# EAGLE board ETH-IO_v2.1 (EAGLE 9.6.2)
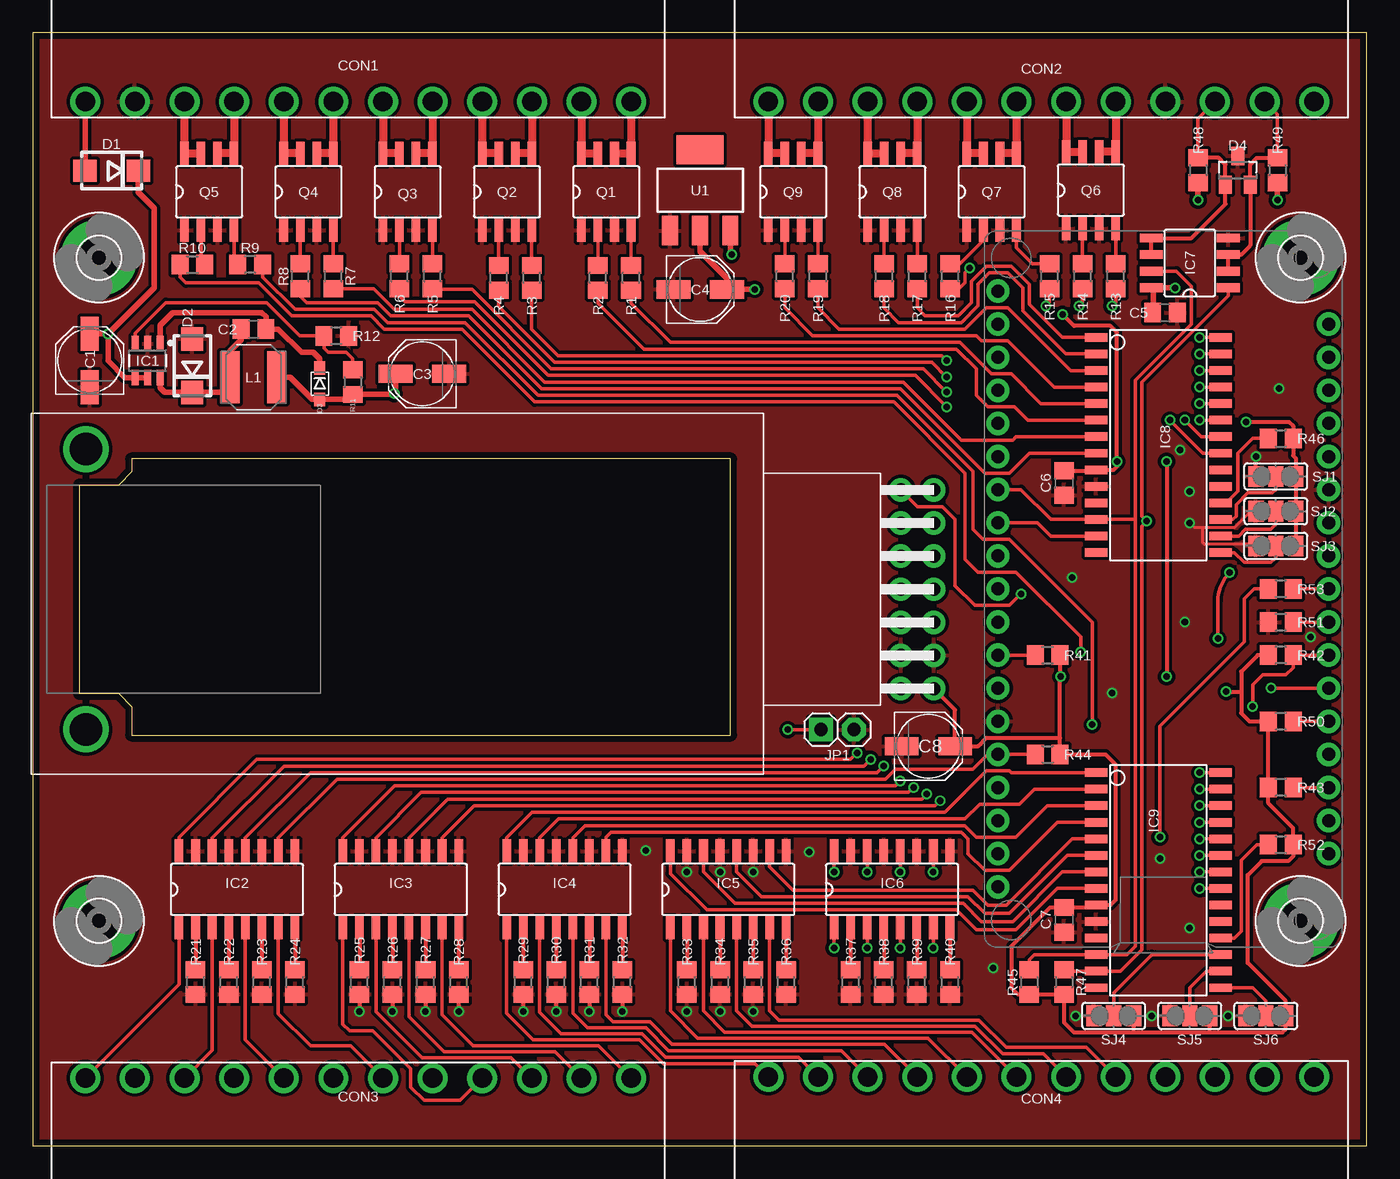
[diagram p0: board, top side]
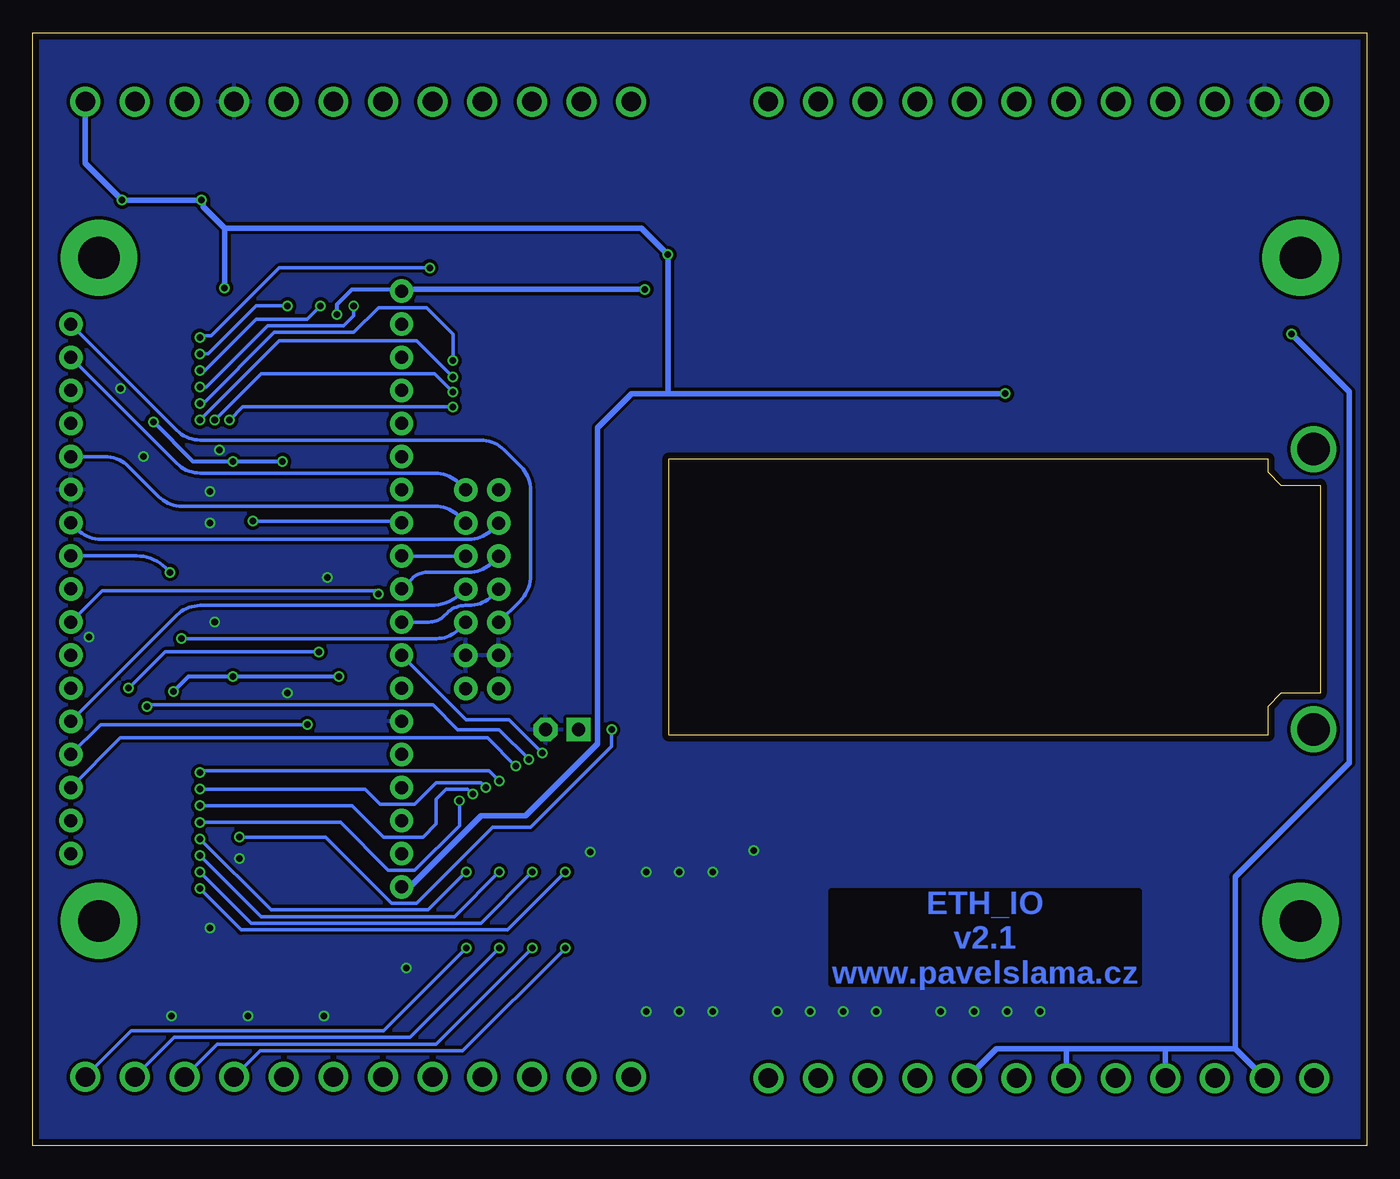
[diagram p1: board, bottom side, seen from below]

Size 102.45 x 85.45 mm. Coordinates in mm from the lower left corner, seen from the top.
Outline: 0,85.45 0,0 102.45,0 102.45,85.45 0,85.45
Copper layers (1*16): Top 0.035mm / dielectric 1.6mm / Bottom 0.035mm
Design rules "Elecrow_2-layer_optimal_PCB_eagle_rule *": minimum track width 6mil, minimum drill 12mil, track to track 6mil, track to pad 6mil, pad to pad 6mil, via to via 8mil, smd to smd 0mil, copper to edge 20mil, drill to drill 10mil, minimum pad ring 0.4mm, minimum via ring 6mil, stop-mask expansion 0mil, vias tented up to drill 100mil, thermal gap 10mil
Net classes: 0 default: width 0.254 mm, drill 0.5 mm; 1 ETH: width 0.254 mm, drill 0.35 mm; 2 RMII-TX: width 0.254 mm, drill 0.35 mm; 3 RMII-RX: width 0.254 mm, drill 0.35 mm; 4 I2C: width 0.254 mm, drill 0.35 mm; 5 PWR: width 0.305 mm, drill 0.5 mm; 6 I2C_DIFF: width 0.254 mm, drill 0.5 mm

## Footprints (pad centres in the part's own frame; a part is rotated, then mirrored left to right if it is on the bottom)
PANASONIC_C = smd 2.6 x 1.4: + 2.05,0; - -2.05,0
C0805 = smd 1.3 x 1.5: 1 -0.95,0; 2 0.95,0
MC1,5/12-G-3,81 = drill 1.5: 1 -20.955,8; 2 -17.145,8; 3 -13.335,8; 4 -9.525,8; 5 -5.715,8; 6 -1.905,8; 7 1.905,8; 8 5.715,8; 9 9.525,8; 10 13.335,8; 11 17.145,8; 12 20.955,8
DO214AC = smd 1.8 x 1.7: A 2.05,0; C -2.05,0
SOD323 = smd 1.03 x 0.839: A 1.206,0; C -1.206,0
SOT23 = smd 1 x 1.4: 1 -0.95,-1.1; 2 0.95,-1.1; 3 0,1.1
3,2-PAD = drill 3.2 pad 5.842: B3,2 0,0
SOT23-6 = smd 1.2 x 0.55: 1 -1.3,0.95; 2 -1.3,0; 3 -1.3,-0.95; 4 1.3,-0.95; 5 1.3,0; 6 1.3,0.95
SO16 = smd 0.66 x 1.778: 1 -4.445,-2.946; 2 -3.175,-2.946; 3 -1.905,-2.946; 4 -0.635,-2.946; 5 0.635,-2.946; 6 1.905,-2.946; 7 3.175,-2.946; 8 4.445,-2.946; 9 4.445,2.946; 10 3.175,2.946; 11 1.905,2.946; 12 0.635,2.946; 13 -0.635,2.946; 14 -1.905,2.946; 15 -3.175,2.946; 16 -4.445,2.946
SO08 = smd 0.66 x 1.778: 1 -1.905,-2.946; 2 -0.635,-2.946; 3 0.635,-2.946; 4 1.905,-2.946; 5 1.905,2.946; 6 0.635,2.946; 7 -0.635,2.946; 8 -1.905,2.946
SO28W = smd 0.65 x 1.7: 1 -7.62,-4.78; 2 -6.35,-4.78; 3 -5.08,-4.78; 4 -3.81,-4.78; 5 -2.54,-4.78; 6 -1.27,-4.78; 7 0,-4.78; 8 1.27,-4.78; 9 2.54,-4.78; 10 3.81,-4.78; 11 5.08,-4.78; 12 6.35,-4.78; 13 7.62,-4.78; 14 8.89,-4.78; 15 8.89,4.78; 16 7.62,4.78; 17 6.35,4.78; 18 5.08,4.78; 19 3.81,4.78; 20 2.54,4.78; 21 1.27,4.78; 22 0,4.78; 23 -1.27,4.78; 24 -2.54,4.78; 25 -3.81,4.78; 26 -5.08,4.78; 27 -6.35,4.78; 28 -7.62,4.78
1X02-S = drill 1.016 square: 1 -1.27,0 | drill 1.016 octagon: 2 1.27,0
L5040 = smd 1.5 x 4: 1 -1.8,0; 2 1.8,0
SO8 = smd 0.66 x 1.778: 1 -1.905,-2.946; 2 -0.635,-2.946; 3 0.635,-2.946; 4 1.905,-2.946; 5 1.905,2.946; 6 0.635,2.946; 7 -0.635,2.946; 8 -1.905,2.946
R0805 = smd 1.3 x 1.5: 1 -0.95,0; 2 0.95,0
SJ_2 = smd 1.168 x 1.6: 1 -1.524,0; 2 0,0; 3 1.524,0
SOT223 = smd 1.219 x 2.235: 1 -2.311,-3.099; 2 0,-3.099; 3 2.311,-3.099 | smd 3.6 x 2.2: 4 0,3.099
ESP32_DEVKITV1_38PIN = drill 1: +3V3 -12.7,22.86; CMD -12.7,-20.32; EN -12.7,20.32; G0 12.7,-10.16; G2 12.7,-12.7; G4 12.7,-7.62; G5 12.7,0; G12 -12.7,-7.62; G13 -12.7,-12.7; G14 -12.7,-5.08; G15 12.7,-15.24; G16 12.7,-5.08; G17 12.7,-2.54; G18 12.7,2.54; G19 12.7,5.08; G21 12.7,10.16; G22 12.7,17.78; G23 12.7,20.32; G25 -12.7,2.54; G26 -12.7,0; G27 -12.7,-2.54; G32 -12.7,7.62; G33 -12.7,5.08; G34 -12.7,12.7; G35 -12.7,10.16; GND@2 12.7,7.62; GND@3 -12.7,-10.16; RX0 12.7,12.7; SD0 12.7,-20.32; SD1 12.7,-17.78; SD2 -12.7,-15.24; SD3 -12.7,-17.78; SN -12.7,15.24; SP -12.7,17.78; TX0 12.7,15.24; VIN -12.7,-22.86
LAN8720_ETH_BOARD = drill 1: CRS 10.56,0; GND 13.1,-5.08; GND@1 10.56,-5.08; INT 13.1,0; MDC 10.56,-2.54; MDIO 13.1,-2.54; RX0 13.1,2.54; RX1 10.56,2.54; TX0 10.56,5.08; TX1 13.1,7.62; TX_EN 13.1,5.08; TXCO_EN 10.56,7.62; VCC 13.1,-7.62; VCC@1 10.56,-7.62 | drill 2.5: H1 -52,-10.75; H2 -52,10.75

## Placement (x,y rotation side)
C1  22uF/50V  [PANASONIC_C]  4.39,60.27 90 top
C2  100n  [C0805]  16.97,62.69 180 top
C3  22uF/50V  [PANASONIC_C]  29.92,59.26 180 top
C4  22uF/50V  [PANASONIC_C]  51.26,65.73 0 top
C5  100n  [C0805]  86.94,63.96 0 top
C6  100n  [C0805]  79.2,50.88 270 top
C7  100n  [C0805]  79.2,17.35 270 top
C8  100uF/6.3V  [PANASONIC_C]  68.78,30.68 0 top
CON1  MC1,5-12-G-3,81  [MC1,5/12-G-3,81]  25,88.15 180 top
CON2  MC1,5-12-G-3,81  [MC1,5/12-G-3,81]  77.45,88.15 180 top
CON3  MC1,5-12-G-3,81  [MC1,5/12-G-3,81]  25,-2.8 0 top
CON4  MC1,5-12-G-3,81  [MC1,5/12-G-3,81]  77.45,-2.7 0 top
D1  SS16  [DO214AC]  6.07,74.85 180 top
D2  SS16  [DO214AC]  12.27,59.89 90 top
D3  1N4148WS  [SOD323]  22.05,58.5 270 top
D4  BAT54A  [SOT23]  92.53,74.88 0 top
H1  MOUNT-PAD-ROUND3.2  [3,2-PAD]  5.1,17.28 0 top
H2  MOUNT-PAD-ROUND3.2  [3,2-PAD]  97.35,17.28 0 top
H3  MOUNT-PAD-ROUND3.2  [3,2-PAD]  97.35,68.17 0 top
H4  MOUNT-PAD-ROUND3.2  [3,2-PAD]  5.1,68.17 0 top
IC1  MCP16301T-I/CH  [SOT23-6]  8.84,60.27 270 top
IC2  TLP290-4  [SO16]  15.7,19.68 0 top
IC3  TLP290-4  [SO16]  28.27,19.68 0 top
IC4  TLP290-4  [SO16]  40.84,19.68 0 top
IC5  TLP290-4  [SO16]  53.42,19.68 0 top
IC6  TLP290-4  [SO16]  65.99,19.68 0 top
IC7  P82B96TD  [SO08]  88.85,67.77 90 top
IC8  MCP23017-E/SO  [SO28W]  86.44,54.43 270 top
IC9  MCP23017-E/SO  [SO28W]  86.44,21.03 270 top
JP1  [1X02-S]  61.8,31.95 0 top
L1  SRN5040-220M  [L5040]  16.97,59 180 top
Q1  BTS3410G  [SO8]  44.04,73.23 0 top
Q2  BTS3410G  [SO8]  36.42,73.23 0 top
Q3  BTS3410G  [SO8]  28.8,73.23 0 top
Q4  BTS3410G  [SO8]  21.18,73.23 0 top
Q5  BTS3410G  [SO8]  13.56,73.23 0 top
Q6  BTS3410G  [SO8]  81.25,73.35 0 top
Q7  BTS3410G  [SO8]  73.63,73.23 0 top
Q8  BTS3410G  [SO8]  66.01,73.23 0 top
Q9  BTS3410G  [SO8]  58.39,73.23 0 top
R1  1K  [R0805]  45.95,66.62 90 top
R2  1K  [R0805]  43.41,66.62 90 top
R3  1K  [R0805]  38.33,66.62 90 top
R4  1K  [R0805]  35.79,66.62 90 top
R5  1K  [R0805]  30.71,66.75 90 top
R6  1K  [R0805]  28.17,66.75 90 top
R7  1K  [R0805]  23.09,66.75 90 top
R8  1K  [R0805]  20.55,66.75 90 top
R9  1K  [R0805]  16.71,67.64 180 top
R10  1K  [R0805]  12.27,67.64 0 top
R11  52K3  [R0805]  24.59,58.62 270 top
R12  10K 1%  [R0805]  23.32,62.18 180 top
R13  1K  [R0805]  83.16,66.75 90 top
R14  1K  [R0805]  80.62,66.75 90 top
R15  1K  [R0805]  78.08,66.75 90 top
R16  1K  [R0805]  70.46,66.75 90 top
R17  1K  [R0805]  67.92,66.75 90 top
R18  1K  [R0805]  65.38,66.75 90 top
R19  1K  [R0805]  60.3,66.75 90 top
R20  1K  [R0805]  57.76,66.75 90 top
R21  3K9  [R0805]  12.52,12.57 90 top
R22  3K9  [R0805]  15.06,12.57 90 top
R23  3K9  [R0805]  17.6,12.57 90 top
R24  3K9  [R0805]  20.14,12.57 90 top
R25  3K9  [R0805]  25.1,12.57 90 top
R26  3K9  [R0805]  27.64,12.57 90 top
R27  3K9  [R0805]  30.18,12.57 90 top
R28  3K9  [R0805]  32.71,12.57 90 top
R29  3K9  [R0805]  37.67,12.57 90 top
R30  3K9  [R0805]  40.21,12.57 90 top
R31  3K9  [R0805]  42.75,12.57 90 top
R32  3K9  [R0805]  45.29,12.57 90 top
R33  3K9  [R0805]  50.24,12.57 90 top
R34  3K9  [R0805]  52.78,12.57 90 top
R35  3K9  [R0805]  55.32,12.57 90 top
R36  3K9  [R0805]  57.86,12.57 90 top
R37  3K9  [R0805]  62.81,12.57 90 top
R38  3K9  [R0805]  65.35,12.57 90 top
R39  3K9  [R0805]  67.89,12.57 90 top
R40  3K9  [R0805]  70.43,12.57 90 top
R41  10K  [R0805]  77.93,37.67 0 top
R42  10K  [R0805]  95.83,37.67 180 top
R43  10K  [R0805]  95.83,27.51 180 top
R44  10K  [R0805]  77.93,30.05 0 top
R45  2K2  [R0805]  76.53,12.57 270 top
R46  1K  [R0805]  95.83,54.3 0 top
R47  2K2  [R0805]  79.2,12.57 270 top
R48  680R  [R0805]  89.48,74.88 270 top
R49  680R  [R0805]  95.58,74.88 270 top
R50  4K7  [R0805]  95.83,32.59 180 top
R51  4K7  [R0805]  95.83,40.21 0 top
R52  1K  [R0805]  95.83,23.12 0 top
R53  680R  [R0805]  95.83,42.75 180 top
SJ1  [SJ_2]  95.45,51.38 0 top
SJ2  [SJ_2]  95.45,48.72 0 top
SJ3  [SJ_2]  95.45,46.05 0 top
SJ4  [SJ_2]  83.01,9.98 0 top
SJ5  [SJ_2]  88.85,9.98 0 top
SJ6  [SJ_2]  94.69,9.98 0 top
U1  LM1117-3.3  [SOT223]  51.26,73.35 0 top
U2  ESP32_DEVKITV1-38PIN  [ESP32_DEVKITV1_38PIN]  86.82,42.75 0 top
U3  WURTH 613014243121  [LAN8720_ETH_BOARD]  56.1,42.73 0 top

## Library data of the parts
C1-C8 = rcl; SPICEPREFIX: C
CON1-CON4 = my-con-terminal
D1 = my-diode; A: 1; V: 60
D2 = my-diode; A: 1; V: 40
D3 = my-diode
D4 = diode
H1-H4 = holes
IC1 = my-power
IC2-IC6 = my-opto
IC7 = my-ic; MSL: 1
IC8 IC9 = microchip; MF: MICROCHIP; MPN: MCP23017-E/SO; OC_FARNELL: 1332087; OC_NEWARK: 31K2958
JP1 = pinhead-2
L1 = my-inductor; ALT: DJNR5040-220-S; UH: 22
Q1-Q9 = my-load-switch
R1-R53 = rcl; SPICEPREFIX: R
SJ1-SJ6 = jumper
U1 = my-power; ALT: AMS1117-3.3
U2 = tmp
U3 = my-modules

## Nets
+3V3 [PWR]: C4.+ C6.1 C7.1 C8.+ IC8.9 IC9.9 R41.2 R42.2 R43.2 R44.2 R45.2 R46.2 R47.2 R50.2 R52.2 SJ1.3 SJ2.3 SJ3.3 SJ4.3 SJ5.3 SJ6.3 U1.2 U1.4 U2.+3V3 U3.VCC U3.VCC@1
+5V [PWR]: C3.+ C5.1 CON2.1 D3.A IC7.8 L1.1 R11.2 R48.2 R49.2 U1.3 U2.VIN
+24V [PWR]: C1.+ CON3.2 CON3.4 CON3.6 CON3.8 D1.C IC1.4 IC1.5
C_IN1: CON3.9 IC3.1
C_IN2: CON3.10 IC3.3
C_IN3: CON3.11 IC3.5
C_IN4: CON3.12 IC3.7
C_IN5: CON4.1 IC4.1
C_IN6: CON4.2 IC4.3
C_IN7: CON4.3 IC4.5
C_IN8: CON4.4 IC4.7
C_IN9: CON4.5 IC5.1
C_IN10: CON4.6 IC5.3
C_IN11: CON4.7 IC5.5
C_IN12: CON4.8 IC5.7
C_IN13: CON4.9 IC6.1
C_IN14: CON4.10 IC6.3
C_IN15: CON4.11 IC6.5
C_IN16: CON4.12 IC6.7
C_OUT1: CON2.5 Q6.5 Q6.6
C_OUT2: CON2.6 Q6.7 Q6.8
C_OUT3: CON2.7 Q7.5 Q7.6
C_OUT4: CON2.8 Q7.7 Q7.8
C_OUT5: CON2.9 Q8.5 Q8.6
C_OUT6: CON2.10 Q8.7 Q8.8
C_OUT7: CON2.11 Q9.5 Q9.6
C_OUT8: CON2.12 Q9.7 Q9.8
C_OUT9: CON1.1 Q1.5 Q1.6
C_OUT10: CON1.2 Q1.7 Q1.8
C_OUT11: CON1.3 Q2.5 Q2.6
C_OUT12: CON1.4 Q2.7 Q2.8
C_OUT13: CON1.5 Q3.5 Q3.6
C_OUT14: CON1.6 Q3.7 Q3.8
C_OUT15: CON1.7 Q4.5 Q4.6
C_OUT16: CON1.8 Q4.7 Q4.8
C_PWM1: CON1.9 Q5.5 Q5.6
C_PWM2: CON1.10 Q5.7 Q5.8
C_S0-IN1: CON3.1 IC2.1
C_S0-IN2: CON3.3 IC2.3
C_S0-IN3: CON3.5 IC2.5
C_S0-IN4: CON3.7 IC2.7
GND [PWR]: C1.- C3.- C4.- C5.2 C6.2 C7.2 C8.- CON1.11 CON2.4 D2.A D4.3 IC1.2 IC2.9 IC2.11 IC2.13 IC2.15 IC3.9 IC3.11 IC3.13 IC3.15 IC4.9 IC4.11 IC4.13 IC4.15 IC5.9 IC5.11 IC5.13 IC5.15 IC6.9 IC6.11 IC6.13 IC6.15 IC7.4 IC8.10 IC9.10 JP1.2 Q1.1 Q1.3 Q2.1 Q2.3 Q3.1 Q3.3 Q4.1 Q4.3 Q5.1 Q5.3 Q6.1 Q6.3 Q7.1 Q7.3 Q8.1 Q8.3 Q9.1 Q9.3 R12.1 R21.1 R22.1 R23.1 R24.1 R25.1 R26.1 R27.1 R28.1 R29.1 R30.1 R31.1 R32.1 R33.1 R34.1 R35.1 R36.1 R37.1 R38.1 R39.1 R40.1 R51.1 SJ1.1 SJ2.1 SJ3.1 SJ4.1 SJ5.1 SJ6.1 U1.1 U2.GND@2 U2.GND@3 U3.GND U3.GND@1
GPIO0: R50.1 U2.G0 U3.INT
GPIO17 [ETH]: R51.2 U2.G17 U3.TXCO_EN
GPIO18 [ETH]: U2.G18 U3.MDIO
GPIO21 [ETH]: U2.G21 U3.TX_EN
GPIO23 [ETH]: U2.G23 U3.MDC
GPIO27 [ETH]: U2.G27 U3.CRS
IN1: IC3.16 IC9.28
IN2: IC3.14 IC9.27
IN3: IC3.12 IC9.26
IN4: IC3.10 IC9.25
IN5: IC4.16 IC9.1
IN6: IC4.14 IC9.2
IN7: IC4.12 IC9.3
IN8: IC4.10 IC9.4
IN9: IC5.16 IC9.8
IN10: IC5.14 IC9.7
IN11: IC5.12 IC9.6
IN12: IC5.10 IC9.5
IN13: IC6.16 IC9.21
IN14: IC6.14 IC9.22
IN15: IC6.12 IC9.23
IN16: IC6.10 IC9.24
LED1: R53.1 U2.G5
LED_RED: JP1.1 R53.2
N$1: IC9.15 SJ6.2
N$2: IC8.16 SJ2.2
N$3: Q1.2 R2.2
N$4: Q1.4 R1.2
N$5: IC8.18 R46.1
N$6: IC9.18 R52.1
N$7: IC8.15 SJ3.2
N$8: Q5.4 R9.2
N$9: Q5.2 R10.2
N$10: IC9.16 SJ5.2
N$11: IC3.2 R25.2
N$12: IC3.4 R26.2
N$13: IC3.6 R27.2
N$14: IC3.8 R28.2
N$15: IC4.2 R29.2
N$16: IC4.4 R30.2
N$17: IC4.6 R31.2
N$18: IC4.8 R32.2
N$19: IC5.2 R33.2
N$20: IC5.4 R34.2
N$21: IC5.6 R35.2
N$22: IC5.8 R36.2
N$23: IC6.2 R37.2
N$24: IC6.4 R38.2
N$25: IC6.6 R39.2
N$26: IC6.8 R40.2
N$27: IC9.17 SJ4.2
N$28: Q2.4 R3.2
N$29: Q2.2 R4.2
N$30: IC8.17 SJ1.2
N$32: Q3.4 R5.2
N$33: Q3.2 R6.2
N$36: Q4.4 R7.2
N$37: Q4.2 R8.2
N$38: IC2.2 R21.2
N$40: Q6.4 R13.2
N$41: Q6.2 R14.2
N$44: Q7.4 R15.2
N$45: Q7.2 R16.2
N$48: Q8.4 R17.2
N$49: Q8.2 R18.2
N$52: Q9.4 R19.2
N$53: Q9.2 R20.2
N$55: IC2.4 R22.2
N$56: IC2.6 R23.2
N$57: IC2.8 R24.2
N$67: C2.2 D2.C IC1.6 L1.2
N$68: C2.1 D3.C IC1.1
N$69: IC1.3 R11.1 R12.2
OUT1: IC8.27 R13.1
OUT2: IC8.26 R14.1
OUT3: IC8.25 R15.1
OUT4: IC8.28 R16.1
OUT5: IC8.1 R17.1
OUT6: IC8.2 R18.1
OUT7: IC8.3 R19.1
OUT8: IC8.4 R20.1
OUT9: IC8.5 R1.1
OUT10: IC8.6 R2.1
OUT11: IC8.24 R3.1
OUT12: IC8.23 R4.1
OUT13: IC8.22 R5.1
OUT14: IC8.21 R6.1
OUT15: IC8.7 R7.1
OUT16: IC8.8 R8.1
PAIR1_N [RMII-RX]: U2.G26 U3.RX1
PAIR1_P [RMII-RX]: U2.G25 U3.RX0
PAIR2_N [RMII-TX]: U2.G22 U3.TX1
PAIR2_P [RMII-TX]: U2.G19 U3.TX0
PWM1: R9.1 U2.G2
PWM2: R10.1 U2.G4
S0-1: IC2.16 R41.1 U2.G14
S0-2: IC2.14 R42.1 U2.G16
S0-3: IC2.12 R43.1 U2.G15
S0-4: IC2.10 R44.1 U2.G13
SCL [I2C]: IC7.7 IC8.12 IC9.12 R45.1 U2.G32
SCL_X [I2C_DIFF]: CON2.3 D4.1 IC7.5 IC7.6 R48.1
SDA [I2C]: IC7.1 IC8.13 IC9.13 R47.1 U2.G33
SDA_X [I2C_DIFF]: CON2.2 D4.2 IC7.2 IC7.3 R49.1
VCC: CON1.12 D1.A

## Tracks (layer width: path | path; a pad name or v marks a point on that pad's centre or on a via)
+3V3  (via drill 0.5)
  Top 0.305: 78.88,31.32 R44.2 82.37,30.05 83.13,29.29 83.13,18.87 82.75,18.49 IC9.9 arc-45 81.19,18.3 C7.1 78.11,18.3 75.13,15.32 75.13,12.14 75.65,11.62 R45.2 R47.2 79.2,9.47 79.96,8.71 84.53,8.71 | 78.88,31.32 73.25,31.32 72.61,30.68 C8.+ 70.83,33.47 U3.VCC | C6.1 81.59,51.83 IC8.9 83.01,51.89 83.26,52.15 v83.26,52.53 83.26,62.43 82.75,62.94 79.96,62.94 v79.07,63.83 | v93.17,55.58 96.47,55.58 96.78,55.26 R46.2 96.78,52.97 96.98,52.78 SJ1.3 SJ2.3 SJ3.3 | SJ4.3 84.53,8.71 | 84.53,8.71 90.37,8.71 | 90.37,8.71 SJ5.3 | 90.37,8.71 95.96,8.71 96.21,8.97 SJ6.3 96.21,11.12 93.29,14.05 93.29,20.78 94.37,21.85 96.4,21.85 96.78,22.23 R52.2 96.78,24.4 94.88,26.3 R43.2 R50.2 93.42,32.59 92.79,33.22 92.79,34.87 | R42.2 94.06,37.67 92.79,36.4 92.79,34.87 | 78.88,31.32 78.88,35.95 v78.94,36.02 78.88,36.08 R41.2 | v91.64,34.87 92.79,34.87 | v87.07,52.53 v87.07,36.02
  Top 0.406: U1.2 51.26,68.66 53.31,66.61 C4.+ v55.45,65.73
  Bottom 0.305: v79.07,63.83 79.07,64.59 77.93,65.73 74.12,65.73 | v83.26,52.53 v87.07,52.53 90.12,52.53 v93.17,55.58 | v78.94,36.02 v87.07,36.02 90.5,36.02 v91.64,34.87
  Bottom 0.406: U2.+3V3 74.12,65.73 v55.45,65.73
+5V  (via drill 0.5)
  Top 0.406: L1.1 19.76,59 21.48,57.29 D3.A 24.2,57.29 R11.2 27.7,57.67 v27.76,57.73 27.87,57.84 C3.+ | v53.67,68.4 53.57,68.5 U1.3 | C5.1 86.05,63.9 86.05,65.71 IC7.8 v87.71,65.86 | R48.2 v89.48,72.59 | R49.2 v95.58,72.59
  Bottom 0.406: 53.67,57.73 v53.67,68.4 55.7,70.43 87.71,70.43 | v27.76,57.73 53.67,57.73 | U2.VIN 73.48,19.89 68.02,25.35 64.59,25.35 59.07,30.87 59.07,55.13 56.46,57.73 53.67,57.73 | 87.71,70.43 v87.71,65.86 | 87.71,70.43 89.36,72.08 89.36,72.47 v89.48,72.59 v95.58,72.59 98.41,75.42 CON2.1
+24V  (via drill 0.5)
  Top 0.406: D1.C 8.12,73.18 9.35,71.96 9.35,65.88 v5.79,62.32 | C1.+ v5.79,62.32 | IC1.5 IC1.4 7.09,58.97 5.79,60.27 v5.79,62.32
  Bottom 0.406: v5.79,62.32 1.35,57.88 1.35,29.41 10.11,20.65 10.11,7.45 | 15.47,7.45 CON3.4 | 15.47,7.45 23.1,7.45 | 23.1,7.45 CON3.6 | 23.1,7.45 28.46,7.45 CON3.8 | 10.11,7.45 15.47,7.45 | 10.11,7.45 CON3.2
C_IN1
  Top 0.254: IC3.1 23.83,9.35 24.33,8.84 26.11,8.84 29.03,5.92 29.03,4.52 30.05,3.5 32.83,3.5 CON3.9
C_IN2
  Top 0.254: IC3.3 26.37,10.31 29.9,6.78 36.75,6.78 CON3.10
C_IN3
  Top 0.254: IC3.5 28.91,9.93 31.6,7.24 40.11,7.24 CON3.11
C_IN4
  Top 0.254: IC3.7 31.45,10.06 33.81,7.7 43.46,7.7 CON3.12
C_IN5
  Top 0.254: IC4.1 36.4,10.19 38.43,8.15 46.61,8.15 48.45,6.32 55.48,6.32 CON4.1
C_IN6
  Top 0.254: IC4.3 38.94,10.26 40.59,8.61 46.79,8.61 48.59,6.81 58.8,6.81 CON4.2
C_IN7
  Top 0.254: IC4.5 41.48,10.19 42.6,9.07 47.09,9.07 48.84,7.31 62.1,7.31 CON4.3
C_IN8
  Top 0.254: IC4.7 44.02,10.06 44.55,9.53 47.4,9.53 49.1,7.82 65.4,7.82 CON4.4
C_IN9
  Top 0.254: IC5.1 48.97,10.36 51.05,8.28 68.75,8.28 CON4.5
C_IN10
  Top 0.254: IC5.3 51.51,10.36 53.14,8.74 72.11,8.74 CON4.6
C_IN11
  Top 0.254: IC5.5 54.05,10.36 55.22,9.2 72.36,9.2 74.5,7.06 77.59,7.06 CON4.7
C_IN12
  Top 0.254: IC5.7 56.59,10.36 57.3,9.65 72.67,9.65 74.75,7.57 80.9,7.57 CON4.8
C_IN13  (via drill 0.5)
  Top 0.254: IC6.1 v61.54,15.19
  Bottom 0.254: v61.54,15.19 69.42,7.31 84.96,7.31 CON4.9
C_IN14  (via drill 0.5)
  Top 0.254: IC6.3 v64.08,15.19
  Bottom 0.254: v64.08,15.19 71.45,7.82 88.26,7.82 CON4.10
C_IN15  (via drill 0.5)
  Top 0.254: IC6.5 v66.62,15.19
  Bottom 0.254: v66.62,15.19 73.48,8.33 91.56,8.33 CON4.11
C_IN16  (via drill 0.5)
  Top 0.254: IC6.7 v69.16,15.19
  Bottom 0.254: v69.16,15.19 75.51,8.84 94.87,8.84 CON4.12
C_OUT1
  Top 0.61: Q6.6 83.13,76.3 Q6.5 CON2.5
C_OUT2
  Top 0.61: Q6.7 Q6.8 CON2.6
C_OUT3
  Top 0.61: Q7.6 Q7.5 CON2.7
C_OUT4
  Top 0.61: Q7.7 Q7.8 CON2.8
C_OUT5
  Top 0.61: Q8.6 Q8.5 CON2.9
C_OUT6
  Top 0.61: Q8.7 Q8.8 CON2.10
C_OUT7
  Top 0.61: Q9.6 Q9.5 CON2.11
C_OUT8
  Top 0.61: Q9.7 Q9.8 CON2.12
C_OUT9
  Top 0.61: Q1.6 Q1.5 CON1.1
C_OUT10
  Top 0.61: Q1.7 Q1.8 CON1.2
C_OUT11
  Top 0.61: Q2.6 Q2.5 CON1.3
C_OUT12
  Top 0.61: Q2.7 Q2.8 CON1.4
C_OUT13
  Top 0.61: Q3.6 30.63,76.17 Q3.5 CON1.5
C_OUT14
  Top 0.61: Q3.7 Q3.8 CON1.6
C_OUT15
  Top 0.61: Q4.6 Q4.5 CON1.7
C_OUT16
  Top 0.61: Q4.7 Q4.8 CON1.8
C_PWM1
  Top 0.61: Q5.6 Q5.5 CON1.9
C_PWM2
  Top 0.61: Q5.7 Q5.8 CON1.10
C_S0-IN1
  Top 0.254: CON3.1 11.25,12.41 IC2.1
C_S0-IN2
  Top 0.254: CON3.3 13.79,7.33 IC2.3
C_S0-IN3
  Top 0.254: CON3.5 16.33,8.15 IC2.5
C_S0-IN4
  Top 0.254: IC2.7 18.87,10.16 21.34,7.7 24.41,7.7 CON3.7
GND  (via drill 0.5)
  Top 0.22: SJ2.1 93.55,48.72 92.28,47.45 89.86,47.45 | SJ3.1 93.8,46.18 89.99,46.18 89.86,46.3 89.86,47.45 | 89.86,47.45 89.23,47.45 v88.85,47.83
  Top 0.305: R32.1 v45.29,10.31 | R31.1 v42.75,10.31 | R30.1 v40.21,10.31 | R29.1 v37.67,10.31 | R28.1 v32.71,10.31 | R27.1 v30.18,10.31 | R26.1 v27.64,10.31 | R25.1 v25.1,10.31 | SJ1.1 v93.93,52.91
  other vias: 59.64,22.55 50.24,10.31 52.78,10.31 55.32,10.31 47.07,22.68 55.32,21.03 52.78,21.03 50.24,21.03 80.09,9.98 85.93,9.98 91.77,9.98 73.74,13.66 82.88,34.75 88.85,16.71 88.47,40.21 88.85,50.24 79.83,43.64 98.12,39.07 88.09,53.42 95.71,58.12 86.56,22.05
  cutout Bottom: 73.86,33.35 73.86,31.95 72.97,31.95 72.97,33.35
  pour Bottom (isolate 0.254): 0,85.45 0,0 102.45,0 102.45,85.45
  pour Top (isolate 0.254): 0,85.45 0,0 102.45,0 102.45,85.45
GPIO0
  Top 0.254: R50.1 U2.G0
  Bottom 0.254: U2.G0 91.37,40.73 arc45 89.57,41.48 71.88,41.48 arc-45 69.43,42.49 U3.INT
GPIO17  (via drill 0.5)
  Top 0.254: v75.89,42.37 75.01,41.48 72.34,41.48 70.81,43 70.81,48.1 69.84,49.08 67.93,49.08 U3.TXCO_EN | R51.2 U2.G17
  Bottom 0.254: v75.89,42.37 76.15,42.62 97.1,42.62 U2.G17
GPIO18  (via drill 0.5)
  Top 0.254: v91.01,38.94 91.01,41.82 arc-45 91.9,43.97 v91.9,44.02
  Bottom 0.254: v91.9,44.02 92.24,44.36 arc-45 94.47,45.29 U2.G18 | v91.01,38.94 71.42,38.94 arc-45 69.76,39.63 U3.MDIO
GPIO21
  Bottom 0.254: U2.G21 96.89,52.91 arc45 95.09,52.16 92.77,49.84 arc-45 90.97,49.1 71.54,49.1 arc45 69.75,48.35 U3.TX_EN
GPIO23
  Bottom 0.254: U2.G23 91.37,54.92 arc-45 89.57,54.18 68.06,54.18 arc45 66.26,53.43 64.95,52.13 arc45 64.21,50.33 64.21,43.8 arc45 65.03,41.81 U3.MDC
GPIO27
  Bottom 0.254: U2.G27 72.01,40.21 arc-45 70.84,40.7 70.63,40.9 arc45 69.24,41.48 68.96,41.48 arc-45 67.16,42.22 U3.CRS
IN1  (via drill 0.5)
  Top 0.254: IC3.16 23.83,23.65 27.81,27.64 66.24,27.64 v66.62,28.02 | IC9.28 v89.61,28.65
  Bottom 0.254: v66.62,28.02 67.39,28.78 89.48,28.78 v89.61,28.65
IN2  (via drill 0.5)
  Top 0.254: IC3.14 26.37,23.65 29.85,27.13 67.26,27.13 v67.64,27.51 | IC9.27 v89.61,27.38
  Bottom 0.254: v67.64,27.51 68.02,27.89 71.45,27.89 73.1,26.24 75.77,26.24 76.91,27.38 v89.61,27.38
IN3  (via drill 0.5)
  Top 0.254: IC3.12 28.91,23.65 31.88,26.62 68.27,26.62 v68.66,27 | IC9.26 v89.61,26.11
  Bottom 0.254: v68.66,27 69.04,27.38 70.69,27.38 71.45,26.62 71.45,24.71 72.47,23.7 75.51,23.7 77.93,26.11 v89.61,26.11
IN4  (via drill 0.5)
  Top 0.254: IC3.10 31.45,23.65 33.91,26.11 69.29,26.11 v69.67,26.49 | IC9.25 v89.61,24.84
  Bottom 0.254: v69.67,26.49 69.67,24.59 73.1,21.16 75.13,21.16 78.82,24.84 v89.61,24.84
IN5
  Top 0.254: IC4.16 36.4,23.65 38.35,25.6 70.05,25.6 73.23,28.78 75.01,28.78 75.13,28.65 IC9.1
IN6
  Top 0.254: IC4.14 38.94,23.65 40.39,25.1 71.58,25.1 72.72,26.24 75.77,26.24 76.91,27.38 IC9.2
IN7
  Top 0.254: IC4.12 41.48,23.65 42.42,24.59 71.58,24.59 72.47,23.7 75.51,23.7 77.93,26.11 IC9.3
IN8
  Top 0.254: IC4.10 44.02,23.7 44.4,24.08 71.32,24.08 71.83,23.57 71.83,22.43 73.1,21.16 75.01,21.16 78.69,24.84 IC9.4
IN9
  Top 0.254: IC5.16 48.97,20.9 51.77,18.11 70.94,18.11 72.47,16.59 75.51,16.59 78.69,19.76 IC9.8
IN10
  Top 0.254: IC5.14 51.51,21.03 53.92,18.62 71.45,18.62 72.85,17.22 75.26,17.22 79.07,21.03 IC9.7
IN11
  Top 0.254: IC5.12 54.05,21.03 55.96,19.13 71.83,19.13 73.1,17.86 75.01,17.86 79.45,22.3 IC9.6
IN12
  Top 0.254: IC5.10 56.59,21.41 58.37,19.63 72.21,19.63 73.35,18.49 74.75,18.49 79.83,23.57 IC9.5
IN13  (via drill 0.5)
  Top 0.254: IC6.16 v61.54,21.03 | v89.61,19.76 IC9.21
  Bottom 0.254: v61.54,21.03 65.99,16.59 86.44,16.59 v89.61,19.76
IN14  (via drill 0.5)
  Top 0.254: IC6.14 v64.08,21.03 | v89.61,21.03 IC9.22
  Bottom 0.254: v64.08,21.03 68.02,17.09 85.67,17.09 v89.61,21.03
IN15  (via drill 0.5)
  Top 0.254: IC6.12 v66.62,21.03 | v89.61,22.3 IC9.23
  Bottom 0.254: v66.62,21.03 70.05,17.6 84.91,17.6 v89.61,22.3
IN16  (via drill 0.5)
  Top 0.254: IC6.10 v69.16,21.03 | v89.61,23.57 IC9.24
  Bottom 0.254: v69.16,21.03 72.08,18.11 84.15,18.11 v89.61,23.57
LED1
  Top 0.254: U2.G5 R53.1
LED_RED  (via drill 0.5)
  Top 0.254: JP1.1 v57.99,31.95 | v86.56,23.7 86.56,32.21 93.04,38.68 93.04,41.99 93.8,42.75 R53.2
  Bottom 0.254: v57.99,31.95 57.99,30.68 64.21,24.46 67.13,24.46 72.97,18.62 74.88,18.62 79.96,23.7 v86.56,23.7
N$1
  Top 0.254: IC9.15 93.67,12.14 94.69,11.12 SJ6.2
N$2
  Top 0.254: IC8.16 92.61,46.81 93.12,47.32 95.07,47.32 95.45,47.7 SJ2.2
N$3
  Top 0.254: Q1.2 R2.2
N$4
  Top 0.254: Q1.4 R1.2
N$5
  Top 0.254: IC8.18 91.64,49.35 92.53,50.24 92.53,53.16 93.67,54.3 R46.1
N$6
  Top 0.254: IC9.18 92.28,15.95 92.79,16.46 92.79,21.92 93.99,23.12 R52.1
N$7
  Top 0.254: IC8.15 92.28,45.54 93.04,44.78 95.07,44.78 95.45,45.16 SJ3.2
N$8
  Top 0.254: Q5.4 15.47,67.93 R9.2
N$9
  Top 0.254: Q5.2 12.93,67.93 R10.2
N$10
  Top 0.254: SJ5.2 88.85,12.14 90.12,13.41 IC9.16
N$11
  Top 0.305: IC3.2 R25.2
N$12
  Top 0.305: IC3.4 R26.2
N$13
  Top 0.305: IC3.6 R27.2
N$14
  Top 0.305: IC3.8 R28.2
N$15
  Top 0.305: IC4.2 R29.2
N$16
  Top 0.305: IC4.4 R30.2
N$17
  Top 0.305: IC4.6 R31.2
N$18
  Top 0.305: IC4.8 R32.2
N$19
  Top 0.305: IC5.2 R33.2
N$20
  Top 0.305: IC5.4 R34.2
N$21
  Top 0.305: IC5.6 R35.2
N$22
  Top 0.305: IC5.8 R36.2
N$23
  Top 0.305: IC6.2 R37.2
N$24
  Top 0.305: IC6.4 R38.2
N$25
  Top 0.305: IC6.6 R39.2
N$26
  Top 0.305: IC6.8 R40.2
N$27
  Top 0.254: SJ4.2 83.01,11.76 85.93,14.68 IC9.17
N$28
  Top 0.254: Q2.4 R3.2
N$29
  Top 0.254: Q2.2 R4.2
N$30
  Top 0.254: IC8.17 92.15,48.08 92.41,48.34 92.41,49.23 93.29,50.11 95.2,50.11 95.45,50.37 SJ1.2
N$32
  Top 0.254: Q3.4 R5.2
N$33
  Top 0.254: Q3.2 R6.2
N$36
  Top 0.254: Q4.4 R7.2
N$37
  Top 0.254: Q4.2 R8.2
N$38
  Top 0.305: IC2.2 R21.2
N$40
  Top 0.254: Q6.4 R13.2
N$41
  Top 0.254: Q6.2 R14.2
N$44
  Top 0.254: Q7.4 75.54,68.93 76.77,67.7 R15.2
N$45
  Top 0.254: R16.2 71.18,67.7 73,69.52 Q7.2
N$48
  Top 0.254: Q8.4 R17.2
N$49
  Top 0.254: Q8.2 R18.2
N$52
  Top 0.254: Q9.4 R19.2
N$53
  Top 0.254: Q9.2 R20.2
N$55
  Top 0.305: IC2.4 R22.2
N$56
  Top 0.305: IC2.6 R23.2
N$57
  Top 0.305: IC2.8 R24.2
N$67
  Top 0.406: IC1.6 9.79,58.18 10.13,57.84 D2.C 15.17,57.84 L1.2 15.17,61.01 16.02,61.86 C2.2
N$68
  Top 0.406: IC1.1 9.79,63 10.74,63.96 17.6,63.96 17.92,63.64 C2.1 18.87,62.69 20.65,60.91 21.54,60.91 22.05,60.4 D3.C
N$69
  Top 0.254: IC1.3 7.89,62.37 10.24,64.72 17.98,64.72 20.52,62.18 R12.2 22.37,61.22 22.68,60.91 24.08,60.91 24.59,60.4 R11.1
OUT1  (via drill 0.5)
  Top 0.254: R13.1 83.16,64.74 v82.88,64.47 | IC8.27 v89.61,60.78
  Bottom 0.254: v82.88,64.47 85.29,64.47 88.98,60.78 v89.61,60.78
OUT2  (via drill 0.5)
  Top 0.254: R14.1 80.62,64.74 v80.34,64.47 | IC8.26 v89.61,59.51
  Bottom 0.254: v80.34,64.47 81.36,63.45 85.29,63.45 89.23,59.51 v89.61,59.51
OUT3  (via drill 0.5)
  Top 0.254: R15.1 78.08,64.74 v77.8,64.47 | IC8.25 v89.61,58.24
  Bottom 0.254: v77.8,64.47 77.8,63.7 78.56,62.94 84.4,62.94 89.1,58.24 v89.61,58.24
OUT4  (via drill 0.5)
  Top 0.254: R16.1 71.13,65.8 71.58,66.24 71.58,67 v71.96,67.39 | v89.61,62.05 IC8.28
  Bottom 0.254: v71.96,67.39 83.52,67.39 88.72,62.18 89.48,62.18 v89.61,62.05
OUT5
  Top 0.254: IC8.1 79.07,62.05 76.53,64.59 76.53,66.12 75.13,67.51 73.23,67.51 72.08,66.37 72.08,64.72 71.07,63.7 68.53,63.7 67.92,64.31 R17.1
OUT6
  Top 0.254: IC8.2 79.32,60.78 76.02,64.08 76.02,65.86 74.88,67 73.48,67 72.59,66.12 72.59,64.47 71.32,63.2 66.5,63.2 65.38,64.31 R18.1
OUT7
  Top 0.254: R19.1 60.3,64.31 61.93,62.69 71.58,62.69 73.23,64.34 74.88,64.34 79.7,59.51 IC8.3
OUT8
  Top 0.254: R20.1 57.76,64.31 59.89,62.18 72.47,62.18 72.85,61.8 74.88,61.8 78.43,58.24 IC8.4
OUT9
  Top 0.254: IC8.5 77.42,56.97 75.13,59.26 73.61,59.26 71.2,61.67 48.97,61.67 45.95,64.69 R1.1
OUT10
  Top 0.254: IC8.6 76.4,55.7 75.39,56.72 73.35,56.72 72.47,57.61 72.47,59.64 70.94,61.16 46.94,61.16 43.41,64.69 R2.1
OUT11  (via drill 0.5)
  Top 0.254: v70.18,60.27 69.8,60.66 40.34,60.66 38.33,62.66 R3.1 | IC8.24 v89.61,56.97
  Bottom 0.254: v89.61,56.97 89.36,56.97 83.9,62.43 77.8,62.43 75.89,64.34 72.21,64.34 70.18,62.31 v70.18,60.27
OUT12  (via drill 0.5)
  Top 0.254: v70.18,59 69.04,60.15 40.08,60.15 35.79,64.44 R4.1 | IC8.23 v89.61,55.7
  Bottom 0.254: v70.18,59 72.97,61.8 83.52,61.8 v89.61,55.7
OUT13  (via drill 0.5)
  Top 0.254: v70.18,57.86 68.4,59.64 39.83,59.64 33.73,65.73 30.3,65.73 30.37,65.8 R5.1 | v88.47,55.7 89.74,54.43 IC8.22
  Bottom 0.254: v70.18,57.86 71.58,59.26 84.91,59.26 v88.47,55.7
OUT14  (via drill 0.5)
  Top 0.254: v70.18,56.72 67.77,59.13 39.57,59.13 33.92,64.78 28.59,64.78 28.17,65.2 R6.1 | IC8.21 89.86,53.16 v87.32,55.7
  Bottom 0.254: v87.32,55.7 86.31,56.72 v70.18,56.72
OUT15
  Top 0.254: IC8.7 75.51,54.43 75.26,54.18 71.32,54.18 66.88,58.62 39.32,58.62 33.73,64.21 27.76,64.21 26.17,65.8 R7.1
OUT16
  Top 0.254: IC8.8 76.53,53.16 75.01,51.64 73.1,51.64 66.62,58.12 39.07,58.12 33.48,63.7 27.51,63.7 26.49,64.72 21.03,64.72 20.55,65.2 R8.1
PAIR1_N
  Bottom 0.254: U2.G26 73.32,43.54 arc45 72.18,44.02 68.96,44.02 arc-45 67.16,44.76 U3.RX1
PAIR1_P
  Bottom 0.254: U3.RX0 74.09,45.27 U2.G25
PAIR2_N
  Bottom 0.254: U2.G22 91.37,52.38 arc-45 89.57,51.64 71.54,51.64 arc45 69.75,50.89 U3.TX1
PAIR2_P
  Bottom 0.254: U2.G19 98.99,47.3 arc-45 97.19,46.56 68.96,46.56 arc-45 67.16,47.3 U3.TX0
PWM1  (via drill 0.5)
  Top 0.254: v81.36,32.33 81.36,40.21 75.01,46.56 72.97,46.56 72.21,47.32 72.21,51.77 66.37,57.61 38.81,57.61 33.22,63.2 27.25,63.2 26.24,64.21 20.14,64.21 17.66,66.69 R9.1
  Bottom 0.254: v81.36,32.33 97.23,32.33 U2.G2
PWM2  (via drill 0.5)
  Top 0.254: v80.47,37.92 80.47,39.07 75.51,44.02 72.59,44.02 71.58,45.03 71.58,51.64 66.12,57.1 38.56,57.1 32.97,62.69 27,62.69 25.98,63.7 19.89,63.7 17.35,66.24 11.76,66.24 11.32,66.68 R10.1 | v95.07,35.13 U2.G4
  Bottom 0.254: v95.07,35.13 92.28,37.92 v80.47,37.92
S0-1  (via drill 0.5)
  Top 0.254: IC2.16 11.25,23.7 17.22,29.67 62.81,29.67 v63.32,30.18 | R41.1 U2.G14
  Bottom 0.254: v63.32,30.18 65.86,32.71 69.16,32.71 U2.G14
S0-2  (via drill 0.5)
  Top 0.254: IC2.14 13.79,23.65 19.3,29.16 63.83,29.16 v64.34,29.67 | v93.67,33.73 93.67,35.38 94.44,36.14 96.21,36.14 96.78,36.71 R42.1 U2.G16
  Bottom 0.254: v64.34,29.67 66.62,31.95 69.8,31.95 71.7,33.86 93.55,33.86 v93.67,33.73
S0-3  (via drill 0.5)
  Top 0.254: IC2.12 16.33,23.65 21.34,28.65 64.85,28.65 v65.35,29.16 | R43.1 U2.G15
  Bottom 0.254: v65.35,29.16 67.51,31.32 95.71,31.32 U2.G15
S0-4
  Top 0.254: IC2.10 18.87,23.65 23.37,28.14 65.48,28.14 66.24,28.91 72.21,28.91 73.35,30.05 U2.G13 R44.1
SCL
  Top 0.254: U2.G32 75.89,50.37 78.18,48.08 IC8.12 84.66,48.08 | 84.66,48.08 84.66,58.75 88.98,63.07 88.98,65.99 87.83,67.13 IC7.7 | 84.66,48.08 84.66,15.32 84.02,14.68 IC9.12 76.91,14.68 76.53,14.3 R45.1
SCL_X
  Top 0.254: R48.1 89.48,78.85 CON2.3
  Top 0.305: R48.1 91.07,75.83 91.58,75.32 D4.1 91.58,72.28 88.98,69.67 IC7.5 IC7.6
SDA  (via drill 0.5)
  Top 0.254: U2.G33 77.16,47.83 78.18,46.81 IC8.13 | IC7.1 91.79,65.25 85.17,58.62 85.17,48.34 v85.55,47.95 85.17,47.57 85.17,15.06 83.52,13.41 IC9.13 79.31,13.41 R47.1
  Bottom 0.254: v85.55,47.95 74.24,47.95 U2.G33
SDA_X
  Top 0.254: CON2.2 95.58,79.16 R49.1
  Top 0.305: R49.1 93.99,75.83 93.48,75.32 D4.2 93.48,69.1 92.79,68.4 IC7.3 IC7.2
VCC
  Top 0.406: CON1.12 4.04,74.88 D1.A

## Text on the board
Bottom: ETH_IO / v2.1 / www.pavelslama.cz